# Altium PCB PIN_Gamma_PCB.PcbDoc
Units mm, origin at the board's own origin, x right, y up, seen from the top; angles counter-clockwise.
Board outline 59.56 x 59.69 mm, 4 copper layers (L1 (Top), Layer 2, Layer 3, L4 (Bottom)), stack 0.778 mm thick; 68 components, 42 nets, 197 pads, 0 vias.
Unrouted connection lines stored in the file: 152.
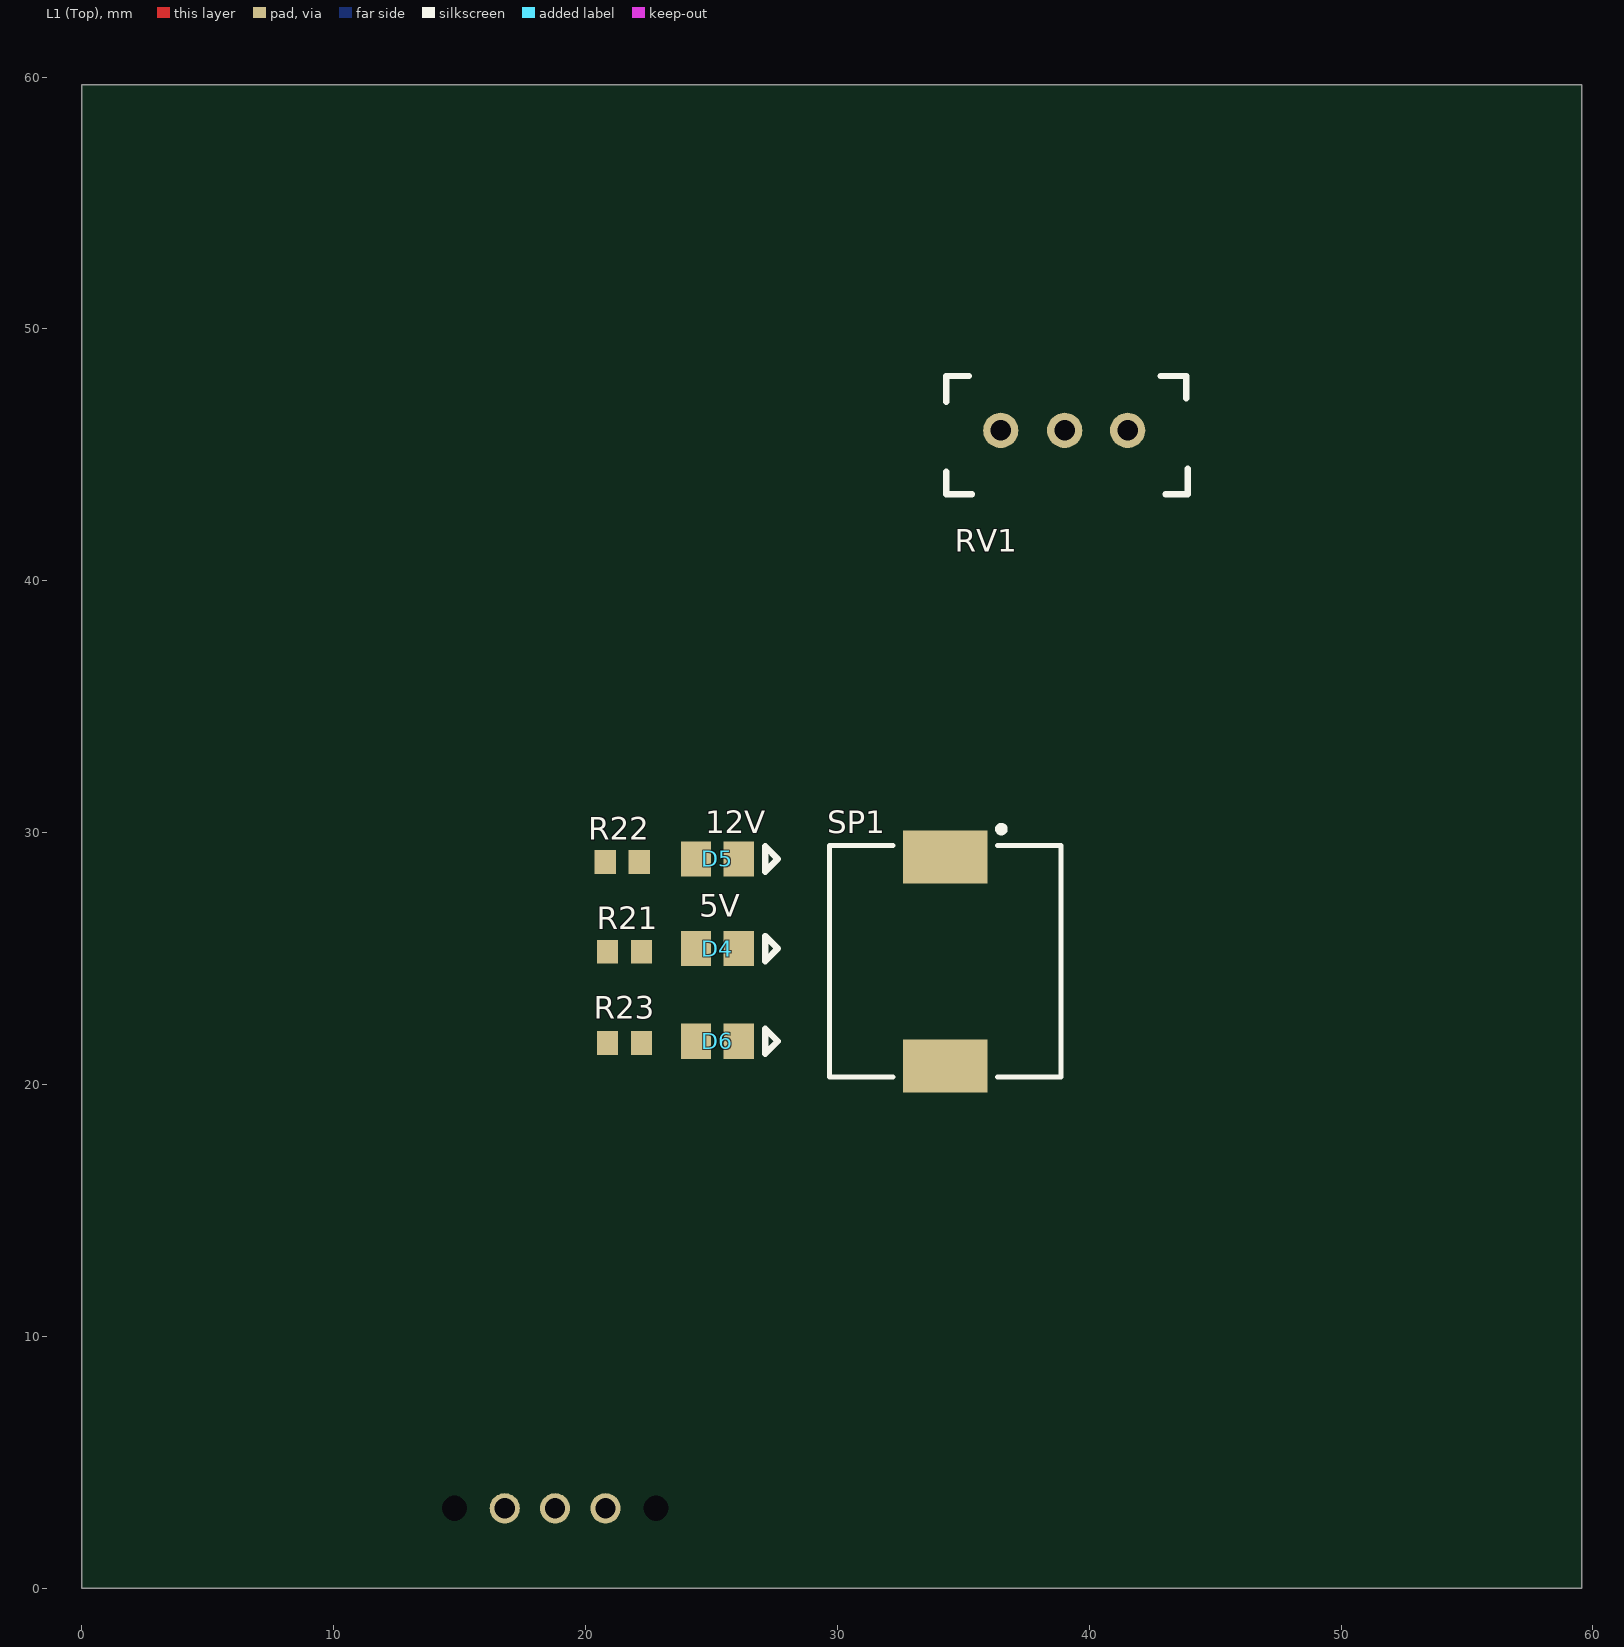
[diagram p0: L1 (Top) view]
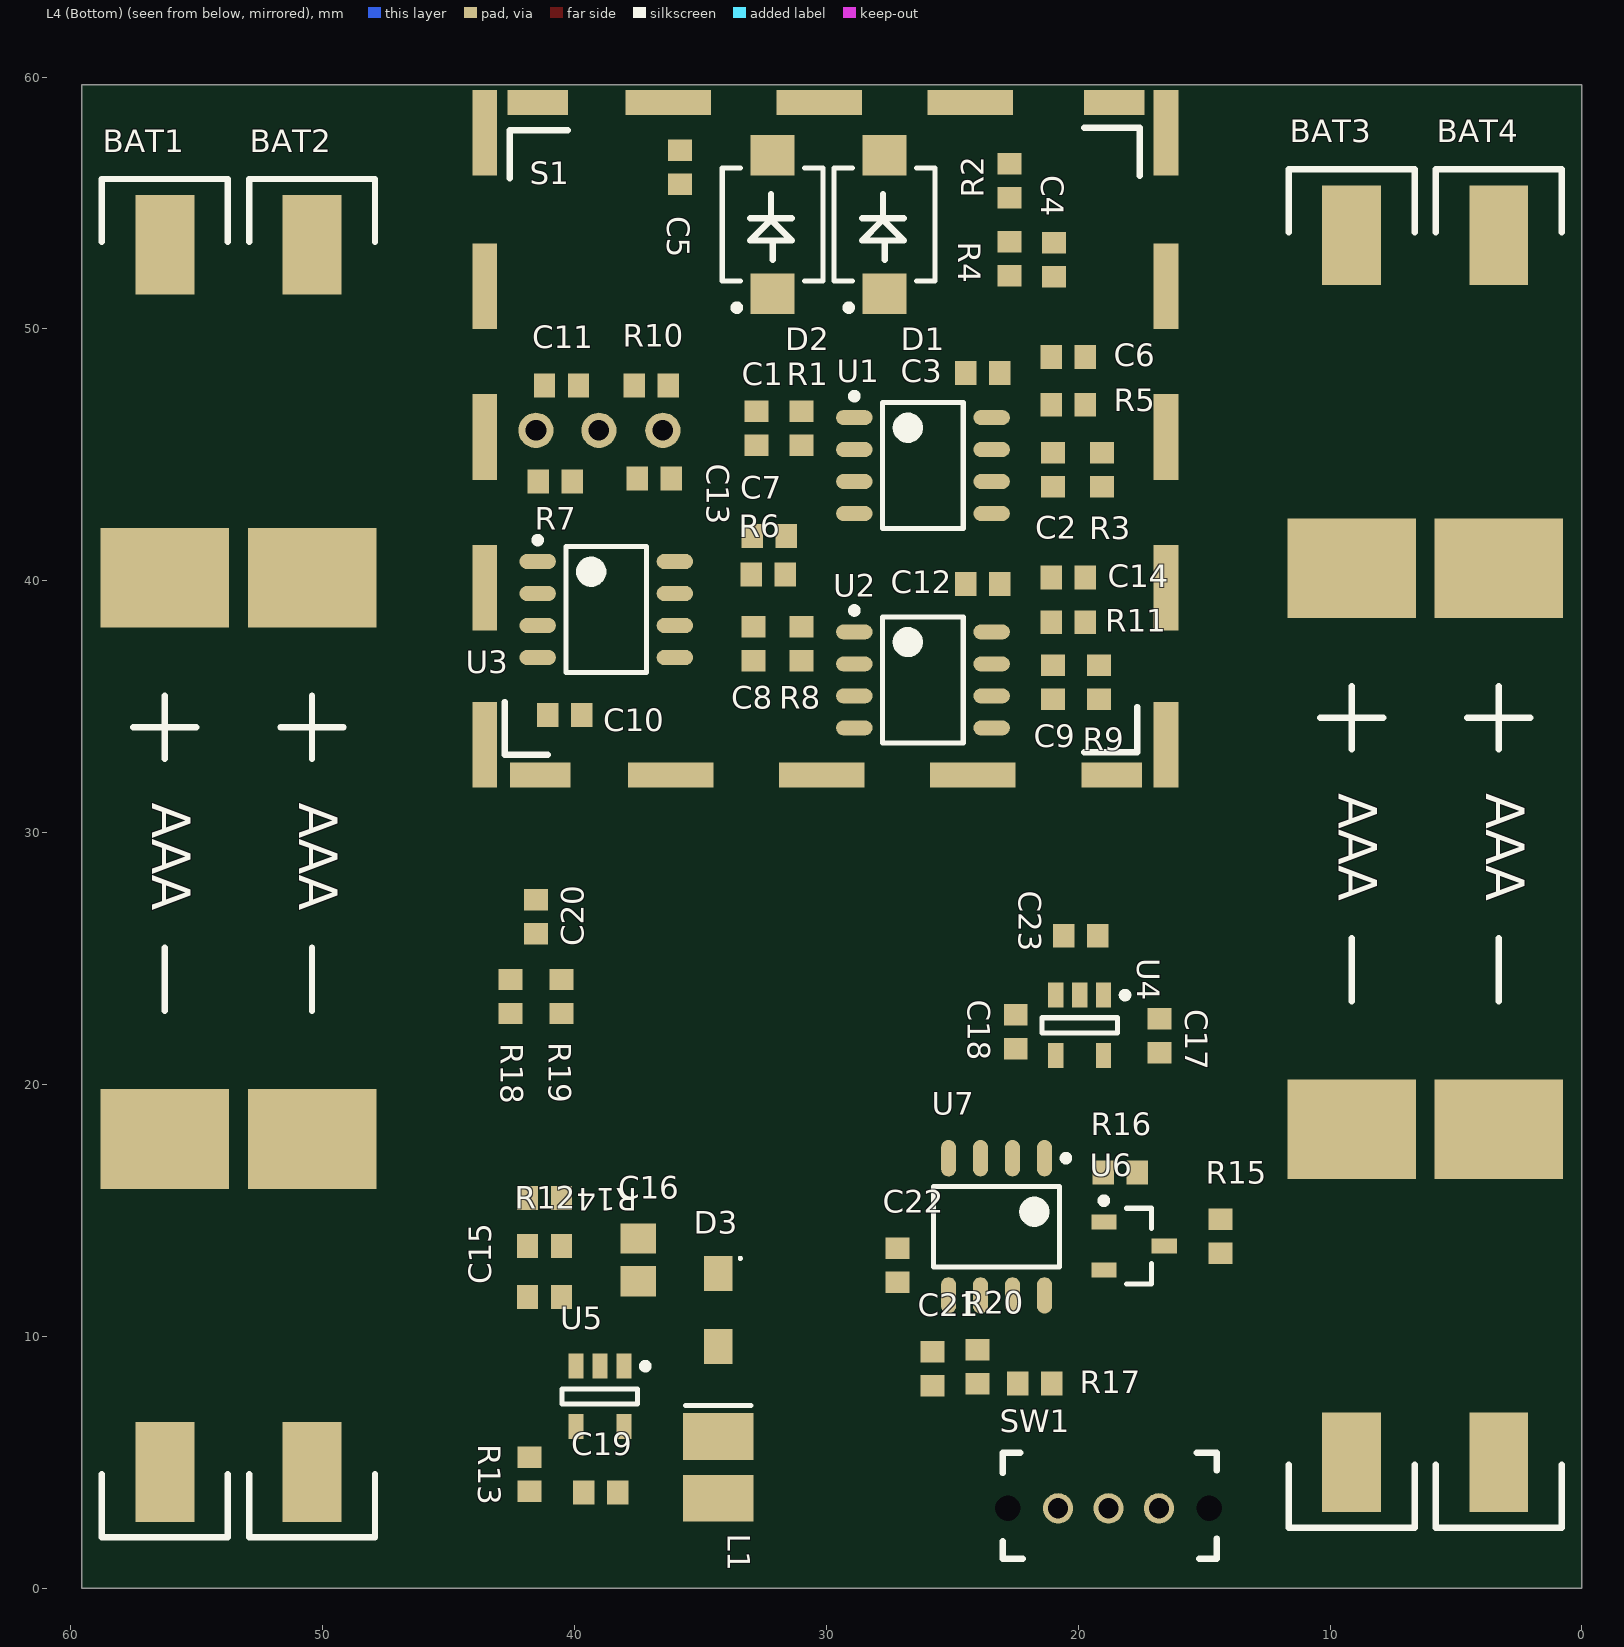
[diagram p1: L4 (Bottom) view, seen from below]

## Layer stack, top to bottom
Top Solder: solder mask 0.0102, Solder Resist, Dk 3.5
L1 (Top): signal copper 0.0356
Dielectric 1: core 0.254, FR-4, Dk 4.2
Layer 2: signal copper 0.036
Dielectric 3: prepreg 0.127, Dk 4.2
Layer 3: signal copper 0.036
Dielectric 2: core 0.254, Dk 4.2
L4 (Bottom): signal copper 0.0356
Bottom Solder: solder mask 0.0102, Solder Resist, Dk 3.5

## Board outline
0,0 59.563,0 59.563,59.69 0,59.69

## Design rules (kind name [scope] priority, off if disabled: settings)
Clearance [All] p1: gap=0.254 ignorepadtopadclearanceinfootprint=FALSE
PolygonConnect [All] p1: connectstyle=Relief reliefconductorwidth=0.254 reliefentries=4 polygonreliefangle="90 Angle" airgapwidth=0.254
RoutingVias [All] p1: holewidth=0.711 width=1.27 viastyle="Through Hole" minholewidth=0.711 minwidth=1.27 maxholewidth=0.711 maxwidth=1.27
SolderMaskExpansion [All] p1: expansion=0.102
Width [All] p1: maxlimit=0.254 minlimit=0.254 preferedwidth=0.254
30 further rules are at their usual default settings.

## Classes and differential pairs
component class PIN_Gamma: C1 C2 C3 C4 C5 C6 C7 C8 C9 C10 C11 C12 C13 C14 D1 D2 R1 R2 R3 R4 R5 R6 R7 R8 R9 R10 R11 RV1 U1 U2 U3
component class PIN_Gamma_Power: BAT1 BAT2 BAT3 BAT4 C15 C16 C17 C18 C19 C20 C21 C22 C23 D3 D4 D5 D6 L1 R12 R13 R14 R15 R16 R17 R18 R19 R20 R21 R22 R23 S1 SP1 SW1 U4 U5 U6 U7

## Components (designator, comment, footprint, x,y, rotation, side; value= is the part's Value field where it differs from the comment)
BAT1 "BAT/AAA_Clips/SMT" AAA_BATTERY_SMT 58.761,1.43 r180 bottom (schematic designator BAT*1)
BAT2 "BAT/AAA_Clips/SMT" AAA_BATTERY_SMT 52.919,1.43 r180 bottom (schematic designator BAT*2)
BAT3 "BAT/AAA_Clips/SMT" AAA_BATTERY_SMT 11.644,1.811 r180 bottom (schematic designator BAT*3)
BAT4 "BAT/AAA_Clips/SMT" AAA_BATTERY_SMT 5.802,1.811 r180 bottom (schematic designator BAT*4)
C1 "C/4P7/0603" C/0603 32.766,46.061 r90 bottom
C2 "C/4P7/0603" C/0603 21.001,44.41 r90 bottom
C3 "C/0.1U/0603" C/0603 23.789,48.26 r0 bottom
C4 "C/0.1U/0603" C/0603 20.955,52.752 r270 bottom
C5 "C/0.01U/0603" C/0603 35.814,56.428 r270 bottom
C6 "C/1000P/0603" C/0603 20.401,48.895 r0 bottom
C7 "C/0.01U/0603" C/0603 32.258,41.783 r180 bottom
C8 "C/4P7/0603" C/0603 32.893,37.505 r90 bottom
C9 "C/4P7/0603" C/0603 21.001,35.981 r90 bottom
C10 "C/0.1U/0603" C/0603 40.386,34.671 r0 bottom
C11 "C/0.1U/0603" C/0603 40.513,47.752 r180 bottom
C12 "C/0.1U/0603" C/0603 23.789,39.878 r0 bottom
C13 "C/0.1U/0603" C/0603 36.83,44.069 r0 bottom
C14 "C/0.01U/0603" C/0603 20.401,40.132 r0 bottom
C15 "C/330P/0805" C/0603 41.188,11.557 r0 bottom
C16 "C/4U7/0805" R/0805 37.465,13.042 r270 bottom locked
C17 "C/1U/0603" C/0603 16.764,21.931 r90 bottom
C18 "C/1U/0603" C/0603 22.479,22.098 r90 bottom
C19 "C/2U2/0603" C/0603 38.949,3.81 r0 bottom
C20 "C/100P/0603" C/0603 41.529,26.67 r90 bottom
C21 "C/0.012U/0603" C/0603 25.781,8.723 r270 bottom
C22 "C/0.1U/0603" C/0603 27.178,12.827 r90 bottom
C23 "C/0.1U/0603" C/0603 19.899,25.908 r180 bottom
D1 "D/VBPW34S" VBPW34S 27.686,54.146 r90 bottom locked
D2 "D/VBPW34S" VBPW34S 32.131,54.146 r90 bottom
D3 "D/MBR1020VL" SOD-123F 34.29,11.049 r270 bottom
D4 "D/LEDG/0805" D/0805 25.234,25.4 r180 top locked
D5 "D/LEDG/0805" D/0805 25.234,28.956 r180 top locked
D6 "D/LEDR/0805" D/0805 25.234,21.717 r180 top locked
L1 "L/10uH/SMD" INDP3030X15N 34.29,4.803 r270 bottom
R1 "R/10M/0603" R/0603 30.988,46.061 r90 bottom
R2 "R/1M/0603" R/0603 22.733,55.88 r270 bottom
R3 "R/10K/0603" R/0603 19.05,44.41 r90 bottom
R4 "R/10M/0603" R/0603 22.733,52.792 r270 bottom
R5 "R/1K/0603" R/0603 20.401,46.99 r180 bottom
R6 "R/1K/0603" R/0603 32.298,40.259 r0 bottom
R7 "R/100K/0603" R/0603 40.767,43.942 r0 bottom
R8 "R/10K/0603" R/0603 30.988,37.505 r90 bottom
R9 "R/10K/0603" R/0603 19.177,35.981 r90 bottom
R10 "R/150K/0603" R/0603 36.957,47.752 r0 bottom
R11 "R/1K/0603" R/0603 20.401,38.354 r180 bottom
R12 "R/118K/0603" R/0603 41.188,13.589 r180 bottom
R13 "R/976K/0603" R/0603 41.783,4.532 r90 bottom
R14 "R/13K7/0603" R/0603 41.188,15.494 r0 bottom
R15 "R/0r/0603" R/0603 14.351,13.97 r270 bottom
R16 "R/1K/0603" R/0603 18.328,16.51 r0 bottom
R17 "R/10K/0603" R/0603 21.717,8.128 r0 bottom
R18 "R/0r/0603" R/0603 42.545,23.495 r90 bottom
R19 "R/0r/0603" R/0603 40.513,23.495 r90 bottom
R20 "R/10K/0603" R/0603 24.003,8.803 r90 bottom
R21 "R/1K/0603" R/0603 21.55,25.273 r0 top
R22 "R/287r/0603" R/0603 21.463,28.829 r0 top
R23 "R/287r/0603" R/0603 21.55,21.644 r0 top
RV1 "RV/10K/25Turn" 10K/25TN 41.529,45.974 r180 top
S1 "RF Shield" "RF SHIELD" 44.061,59.49 r180 bottom locked
SP1 "SP/Piezo" "AUDIO PIEZO" 34.29,24.892 r270 top
SW1 "SW/SPDT/THT" SW/SPDT/THT 18.796,3.175 r0 bottom
U1 "U/MAX4477ASA+-ND" SO8 26.162,44.577 r180 bottom
U2 "U/MAX4477ASA+-ND" SO8 26.162,36.068 r180 bottom
U3 "U/MAX987ESA+-ND" SO8 38.735,38.862 r180 bottom
U4 "U/AP1150ADS50" SOT23-5 19.939,22.352 r270 bottom
U5 "LMR62014" SOT23-5 38.989,7.62 r270 bottom
U6 "U/2N3904/SOT23" SOT23-3 17.78,13.589 r180 bottom
U7 "U/LM555CMX" SO8 23.241,14.351 r270 bottom

## Footprints (in the part's own frame and the unit in brackets; to place one, negate y for a bottom-side part, rotate by r counter-clockwise, add the part's x,y. Pads: shape width x height; smd on the part's side, far side on the other; paste and mask are expansions set on the pad)
10K/25TN [mm]
  round 1.4 hole 0.82: 1(0,0) 2(2.5,0) 3(5.04,0)
  silkscreen extent -2.39,-2.16 7.2,2.54
AAA_BATTERY_SMT [mm] "AAA Battery Holder"
  rect 2.34x3.96 smd: 1(2.5,51.91) 4(2.5,3.19)
  rect 5.1x3.96 smd: 2(2.5,38.69) 3(2.5,16.41)
  silkscreen extent 0,0.6 5,54.52
"AUDIO PIEZO" [mm] "Piezo Speaker 2-Leads, Body 9.00x9.00mm, IPC Medium Density, Digikey 490-9647-1-ND"
  rect 2.1x3.35 smd: 1(-4.15,0) 2(4.15,0)
  silkscreen extent -5.37,-4.6 4.6,4.6, body extent -4.6,-4.5 4.6,4.5, height 2
C/0603 [mm] "Chip Capacitor, 2-Leads, Body 1.60x0.80mm, IPC Medium Density"
  rect 0.85x0.95 smd: 1(-0.675,0) 2(0.675,0)
  body extent -0.85,-0.45 0.85,0.45, height 0.9
D/0805 [mm] "LED, 2-Leads, Body 2.00x1.25mm, IPC Medium Density"
  rect 1.2x1.4 smd: 1(-0.85,0) 2(0.85,0)
  silkscreen extent -2.4,-0.5 -1.9,0.5, body extent -1.05,-0.67 1.05,0.67, height 1.35
INDP3030X15N [mm] "Precision Wire Wound Inductor, 2-Leads, Body 3.00x3.00mm, IPC Medium Density"
  rect 1.85x2.8 smd: 1(-1.225,0) 2(1.225,0)
  silkscreen extent -2.45,-1.3 -2.45,1.3, body extent -1.6,-1.5 1.6,1.5, height 1.6
R/0603 [mm] "Chip Resistor, 2-Leads, Body 1.60x0.80mm, IPC Medium Density"
  rect 0.85x0.95 smd: 1(-0.675,0) 2(0.675,0)
  body extent -0.85,-0.45 0.85,0.45, height 0.9
R/0805 [mm] "Chip Resistor 2-Leads, Body 2.00x1.25mm, IPC Medium Density"
  rect 1.2x1.4 smd: 1(-0.85,0) 2(0.85,0)
  body extent -1.05,-0.67 1.05,0.67, height 1.35
"RF SHIELD" [mm] "1.034X1.034X0.2-NON-VENTED"
  rect 0.99x3.4 smd: 1(0.5,-1.705) 2(0.5,-7.79) 3(0.5,-13.78) 4(0.5,-19.77) 5(0.5,-25.995) 11(27.55,-25.995) 12(27.55,-19.77) 13(27.55,-13.78) 14(27.55,-7.79) 15(27.55,-1.705)
  rect 2.4x0.99 smd: 6(2.7,-27.2) 10(25.4,-27.2) 16(25.5,-0.5) 20(2.6,-0.5)
  rect 3.4x0.99 smd: 7(7.89,-27.2) 8(13.88,-27.2) 9(19.87,-27.2) 17(19.77,-0.5) 18(13.78,-0.5) 19(7.79,-0.5)
  silkscreen extent 1.3,-26.4 26.5,-1.5, body extent -0.13,-27.85 28.2,0.08, height 5.6
SO8 [mm] "SOIC, 8-Leads, Body 4.90x3.90mm, Pitch 1.27mm, IPC Medium Density"
  oval 1.45x0.6 smd: 1(-2.725,1.905) 2(-2.725,0.635) 3(-2.725,-0.635) 4(-2.725,-1.905) 5(2.725,-1.905) 6(2.725,-0.635) 7(2.725,0.635) 8(2.725,1.905)
  silkscreen extent -2.85,-2.5 1.6,2.88, body extent -3,-2.5 3,2.5, height 1.75
SOD-123F [mm] "SODFL, 2-Leads, Body 1.72x3.60mm, IPC Medium Density"
  rect 1.4x1.15 smd: 1(-1.45,0) 2(1.45,0)
  silkscreen extent -2.1,0.82 -2,0.92, body extent -1.8,-0.97 1.8,0.97, height 1.08
SOT23-3 [mm] "SOT23, 3-Leads, Body 2.90x2.45mm, Pitch 0.95mm, IPC Medium Density"
  rect 1x0.6 smd: 1(-1.2,0.95) 2(-1.2,-0.95) 3(1.2,0)
  silkscreen extent -1.33,-1.5 0.7,1.92, body extent -1.3,-1.5 1.3,1.5, height 1.1
SOT23-5 [mm] "SOT23, 5-Leads, Body 2.90x2.45mm, Pitch 0.95mm, IPC Medium Density"
  rect 1x0.6 smd: 1(-1.2,0.95) 2(-1.2,0) 3(-1.2,-0.95) 4(1.2,-0.95) 5(1.2,0.95)
  silkscreen extent -1.32,-1.5 0.3,1.92, body extent -1.3,-1.5 1.3,1.5, height 1.1
SW/SPDT/THT [mm] "SWITCH SLIDE SPDT 200MA 30V"
  round 0 hole 1 unplated: 1(-4,0) 5(4,0)
  round 1.2 hole 0.8: 2(-2,0) 3(0,0) 4(2,0)
  silkscreen extent -4.3,-2.2 4.2,2
VBPW34S [mm] "SODFL, 2-Leads, Body 3.90x6.40mm, IPC Medium Density"
  rect 1.6x1.75 smd: A(-2.75,0) K(2.75,0)
  silkscreen extent -3.42,-2 2.25,2, body extent -3.2,-2 3.2,2, height 1.2

## Part data
BAT1 BAT2 BAT3 BAT4: "AAA 1.5V SMT Clips", Digikey Part=36-55-ND
C1 C2 C8 C9: "CAP CER 4.7PF 50V C0G/NPO 0603", Digikey=311-1740-1-ND
C3 C4 C10 C11 C12 C13 C22 C23: "CAP CER 0.1UF 50V X7R 0603", Digikey Part=399-7845-1-ND
C5 C7 C14: "CAP CER 0.01UF 50V X7R 0603", Digikey Part=399-1091-1-ND
C6: "CAP CER 1000PF 50V C0G/NP0 0603", Digikey=1276-1091-1-ND
C15: "CAP CER 330PF 50V C0G/NP0 0805", Digikey=1276-2645-1-ND
C16: "CAP CER 4.7UF 50V X5R 0805", Digikey=1276-1860-1-ND
C17 C18: "CAP CER 1UF 50V X5R 0603", Digikey=1276-1860-1-ND
C19: "2.2µF ±10% 10V Ceramic Capacitor X5R 0603 (1608 Metric)", Digikey=490-1545-1-ND
C20: "CAP CER 100PF 50V C0G/NP0 0603", Digikey=399-1061-1-ND
C21: "CAP CER 0.012UF 50V X7R 0603", Digikey Part=1276-1785-1-ND
D1 D2: "PHOTODIODE PIN HI SPEED HI SENS"
D3: "Diode Schottky 20V 1A Surface Mount SOD-123F", Digikey Part=MBR1020VLCT-ND
D4 D5: "LED GREEN CLEAR 2.1V 0805 SMD", Digikey Part=160-1423-1-ND
D6: "LED GREEN CLEAR 2V 0805 SMD", Digikey Part=160-1427-1-ND
L1: "10µH Semi-Shielded Wirewound Inductor 1A 276 mOhm Max Nonstandard", Digikey Part=SRN3015-100MCT-ND
R1 R4: "RES SMD 10M OHM 5% 1/10W 0603", Digikey Part=RMCF0603JT10M0CT-ND
R2: "RES SMD 1M OHM 0.1% 1/16W 0603", Digikey Part=A119955CT-ND
R3 R8 R9 R17 R20: "RES SMD 10K OHM 5% 1/10W 0603", Digikey Part=311-10KGRCT-ND
R5 R6 R11 R16 R21: "RES SMD 1K OHM 5% 1/10W 0603", Digikey Part=311-1.0KGRCT-ND
R7: "RES SMD 100K OHM 1% 1/10W 0603", Digikey Part=311-100KHRCT-ND
R10: "RES SMD 150K OHM 1% 1/10W 0603", Digikey Part=311-150KGRDKR-ND
R12: "RES SMD 118K OHM 1% 1/10W 0603", Digikey Part=311-118KHRCT-ND
R13: "RES SMD 976K OHM 1% 1/10W 0603", Digikey Part=311-976KHRCT-ND
R14: "RES SMD 13.7K OHM 1% 1/10W 0603", Digikey Part=311-13.7KHRCT-ND
R15 R18 R19: "RES SMD 0 OHM JUMPER 1/10W 0603", Digikey Part=311-0.0GRCT-ND
R22 R23: "RES SMD 287 OHM 1% 1/10W 0603", Digikey Part=311-287HRCT-ND
RV1: "TRIMMER 10K OHM 0.5W TH", Digikey Part=A105870-ND
S1: "SMS-403C & SMS-403F RF Shield Cover 1.058\" (26.87mm) X 1.058\" (26.87mm) Non-Vented Surface Mount", Digikey PartC=1798-1210-ND, Digikey PartF=1798-1211-1-ND
SP1: "AUDIO PIEZO TRANSDUCER Max 12.5V 4KHZ SMD", Digikey Part=490-9647-1-ND
SW1: "SWITCH SLIDE SPDT 200MA 30V", Digikey Part=A107673-ND
U1 U2: "Dual Low-Noise, Low-Distortion, Wide-Band, Rail-to-Rail Op Amps"
U3: "Comparator General Purpose CMOS, Push-Pull, Rail-to-Rail, TTL 8-SO"
U4: "IC REG LINEAR 5V 200MA SOT23-5", Digikey Part=AP1150ADS50CT-ND
U5: library part U/LMR62014XMF/NOPBCT-ND, "Boost Switching Regulator IC Positive Adjustable 3V 1 Output 1.8A (Switch) SC-74A, SOT-753"
U6: "TRANS NPN 40V 0.2A SOT23", Digikey Part=MMBT3904LT3GOSCT-ND
U7: "555 Type, Timer/Oscillator (Single) IC 8-SOIC"

## Nets (pads, with @x,y where several pads share a name; then routed paths per layer and width w, separated by ;. In a path a pad name is that pad's centre, name@x,y a point inside that pad or via, vN(x,y) a via of type N, cw(c..) or ccw(c..) an arc to the next point about the centre after c; other vN are vias at no path point)
5V: C3.1 C10.1 C12.1 C18.1 R7.1 R15.1 R22.1 U1.8 U2.8 U3.7 U4.4
12V: C15.2 C16.1 C17.1 D3.1 R2.1 R12.1 R21.1 U4.1 U4.5
CompOut: R16.1 R18.1 R23.1 U3.6
GND: BAT4.3 BAT4.4 C3.2 C4.2 C10.2 C11.2 C12.2 C13.2 C16.2 C17.2 C18.2 C19.2 C21.2 C22.2 C23.2 D1.A D2.A D4.1 D5.1 D6.1 R10.2 R14.2 S1.1 S1.2 S1.3 S1.4 S1.5 S1.6 S1.7 S1.8 S1.9 S1.10 S1.11 S1.12 S1.13 S1.14 S1.15 S1.16 S1.17 S1.18 S1.19 S1.20 SP1.2 SW1.1 SW1.5 U1.4 U2.4 U3.4 U4.2 U5.2 U7.1
IN+: C11.1 R7.2 RV1.1 U1.3 U1.5 U2.3 U2.5
NetBAT1_1: BAT1.1 BAT1.2 SW1.4
NetBAT1_3: BAT1.3 BAT1.4 BAT2.1 BAT2.2
NetBAT2_3: BAT2.3 BAT2.4 BAT3.1 BAT3.2
NetBAT3_3: BAT3.3 BAT3.4 BAT4.1 BAT4.2
NetC1_1: C1.1 C5.2 R1.1 U1.2
NetC1_2: C1.2 C6.1 R1.2 U1.1
NetC2_1: C2.1 R3.1 R5.2 U1.6
NetC2_2: C2.2 C7.1 R3.2 U1.7
NetC4_1: C4.1 R2.2 R4.1
NetC5_1: C5.1 D1.K D2.K R4.2
NetC6_2: C6.2 R5.1
NetC7_2: C7.2 R6.1
NetC8_2: C8.2 C14.1 R8.2 U2.1
NetC9_1: C9.1 R9.1 R11.2 U2.6
NetC9_2: C9.2 R9.2 U2.7 U3.2
NetC13_1: C13.1 R10.1 RV1.3
NetC14_2: C14.2 R11.1
NetC15_1: C15.1 R12.2 R14.1 U5.3
NetC20_1: C20.1 R18.2 R19.2
NetC20_2: C20.2 SP1.1
NetC21_1: C21.1 R20.2 U7.2 U7.6
NetC22_1: C22.1 U7.5
NetC23_1: C23.1 U4.3
NetD3_2: D3.2 L1.1 U5.1
NetD4_2: D4.2 R21.2
NetD5_2: D5.2 R22.2
NetD6_2: D6.2 R23.2
NetR13_2: R13.2 U5.4
NetR15_2: R15.2 U6.3
NetR16_2: R16.2 U6.1
NetR17_1: R17.1 U6.2 U7.4 U7.8
NetR17_2: R17.2 R20.1 U7.7
NetR19_1: R19.1 U7.3
NetRV1_2: RV1.2 U3.3
NetSW1_2: SW1.2
OUTB: C8.1 R6.2 R8.1 U2.2
V_Bat: C19.1 L1.2 R13.1 SW1.3 U5.5
pads on no net: U3.1 U3.5 U3.8

## Silkscreen, mask and mechanical layers (free items; w line width, h text height)
Top Overlay:
  text "12V" at 24.765,29.972 h0.9
  text "5V" at 24.511,26.67 h0.9
Mechanical 1:
  the board outline again, w0.254

## Text inside footprints (layer, text, board x,y; h text height)
BAT1: Bottom Overlay "AAA" at 56.761,31.18 h1.52 r90
BAT2: Bottom Overlay "AAA" at 50.919,31.18 h1.52 r90
BAT3: Bottom Overlay "AAA" at 9.644,31.561 h1.52 r90
BAT4: Bottom Overlay "AAA" at 3.802,31.561 h1.52 r90